# EAGLE board barometer_testboard (EAGLE 7.1.0)
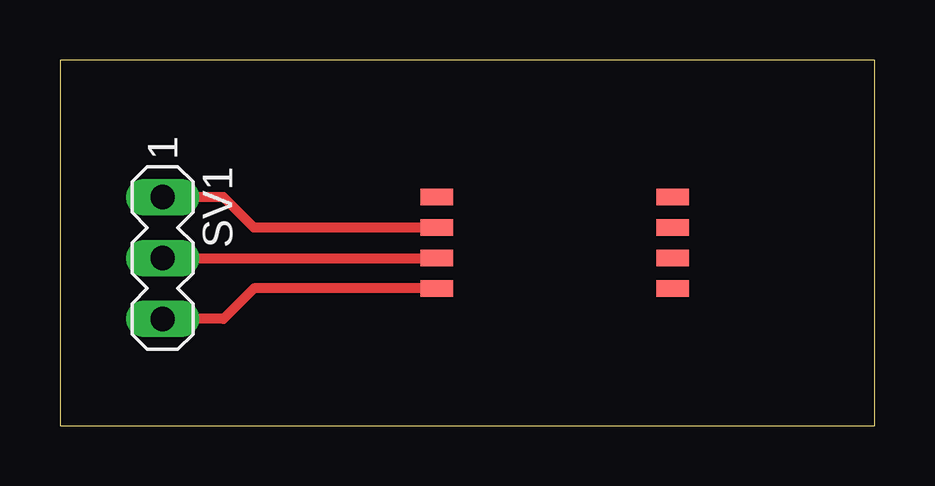
[diagram p0: board, top side]

Size 33.96 x 15.23 mm. Coordinates in mm from the lower left corner, seen from the top.
Outline: 0,0 33.96,0 33.96,15.23 0,15.23 0,0
Copper layers (1*16): Top 0.035mm / dielectric 1.5mm / Bottom 0.035mm
Design rules "default": minimum track width 10mil, minimum drill 24mil, track to track 8mil, track to pad 8mil, pad to pad 8mil, via to via 8mil, smd to smd 8mil, copper to edge 40mil, drill to drill 8mil, minimum pad ring 10mil, minimum via ring 8mil, stop-mask expansion 4mil, vias tented up to drill 0mil, thermal gap 10mil

## Footprints (pad centres in the part's own frame; a part is rotated, then mirrored left to right if it is on the bottom)
MA03-1 = drill 1.016 long: 1 -2.54,0; 2 0,0; 3 2.54,0
SSOP8 = smd 1.346 x 0.686: P1 0,3.81; P2 0,2.54; P3 0,1.27; P4 0,0; P5 9.83,0; P6 9.83,1.27; P7 9.83,2.54; P8 9.83,3.81

## Placement (x,y rotation side)
SV1  [MA03-1]  4.28,6.98 270 top
U$1  [SSOP8]  15.71,5.71 0 top

## Library data of the parts
SV1 = con-lstb
U$1 = altimeter-parts

## Nets
N$1: SV1.1 U$1.P2
N$2: SV1.2 U$1.P3
N$3: SV1.3 U$1.P4

## Tracks (layer width: path | path; a pad name or v marks a point on that pad's centre or on a via)
N$1
  Top 0.406: U$1.P2 8.09,8.25 6.82,9.52 SV1.1
N$2
  Top 0.406: SV1.2 U$1.P3
N$3
  Top 0.406: U$1.P4 8.09,5.71 6.82,4.44 SV1.3